# EAGLE board tmp (EAGLE 6.1), part 1 of 2
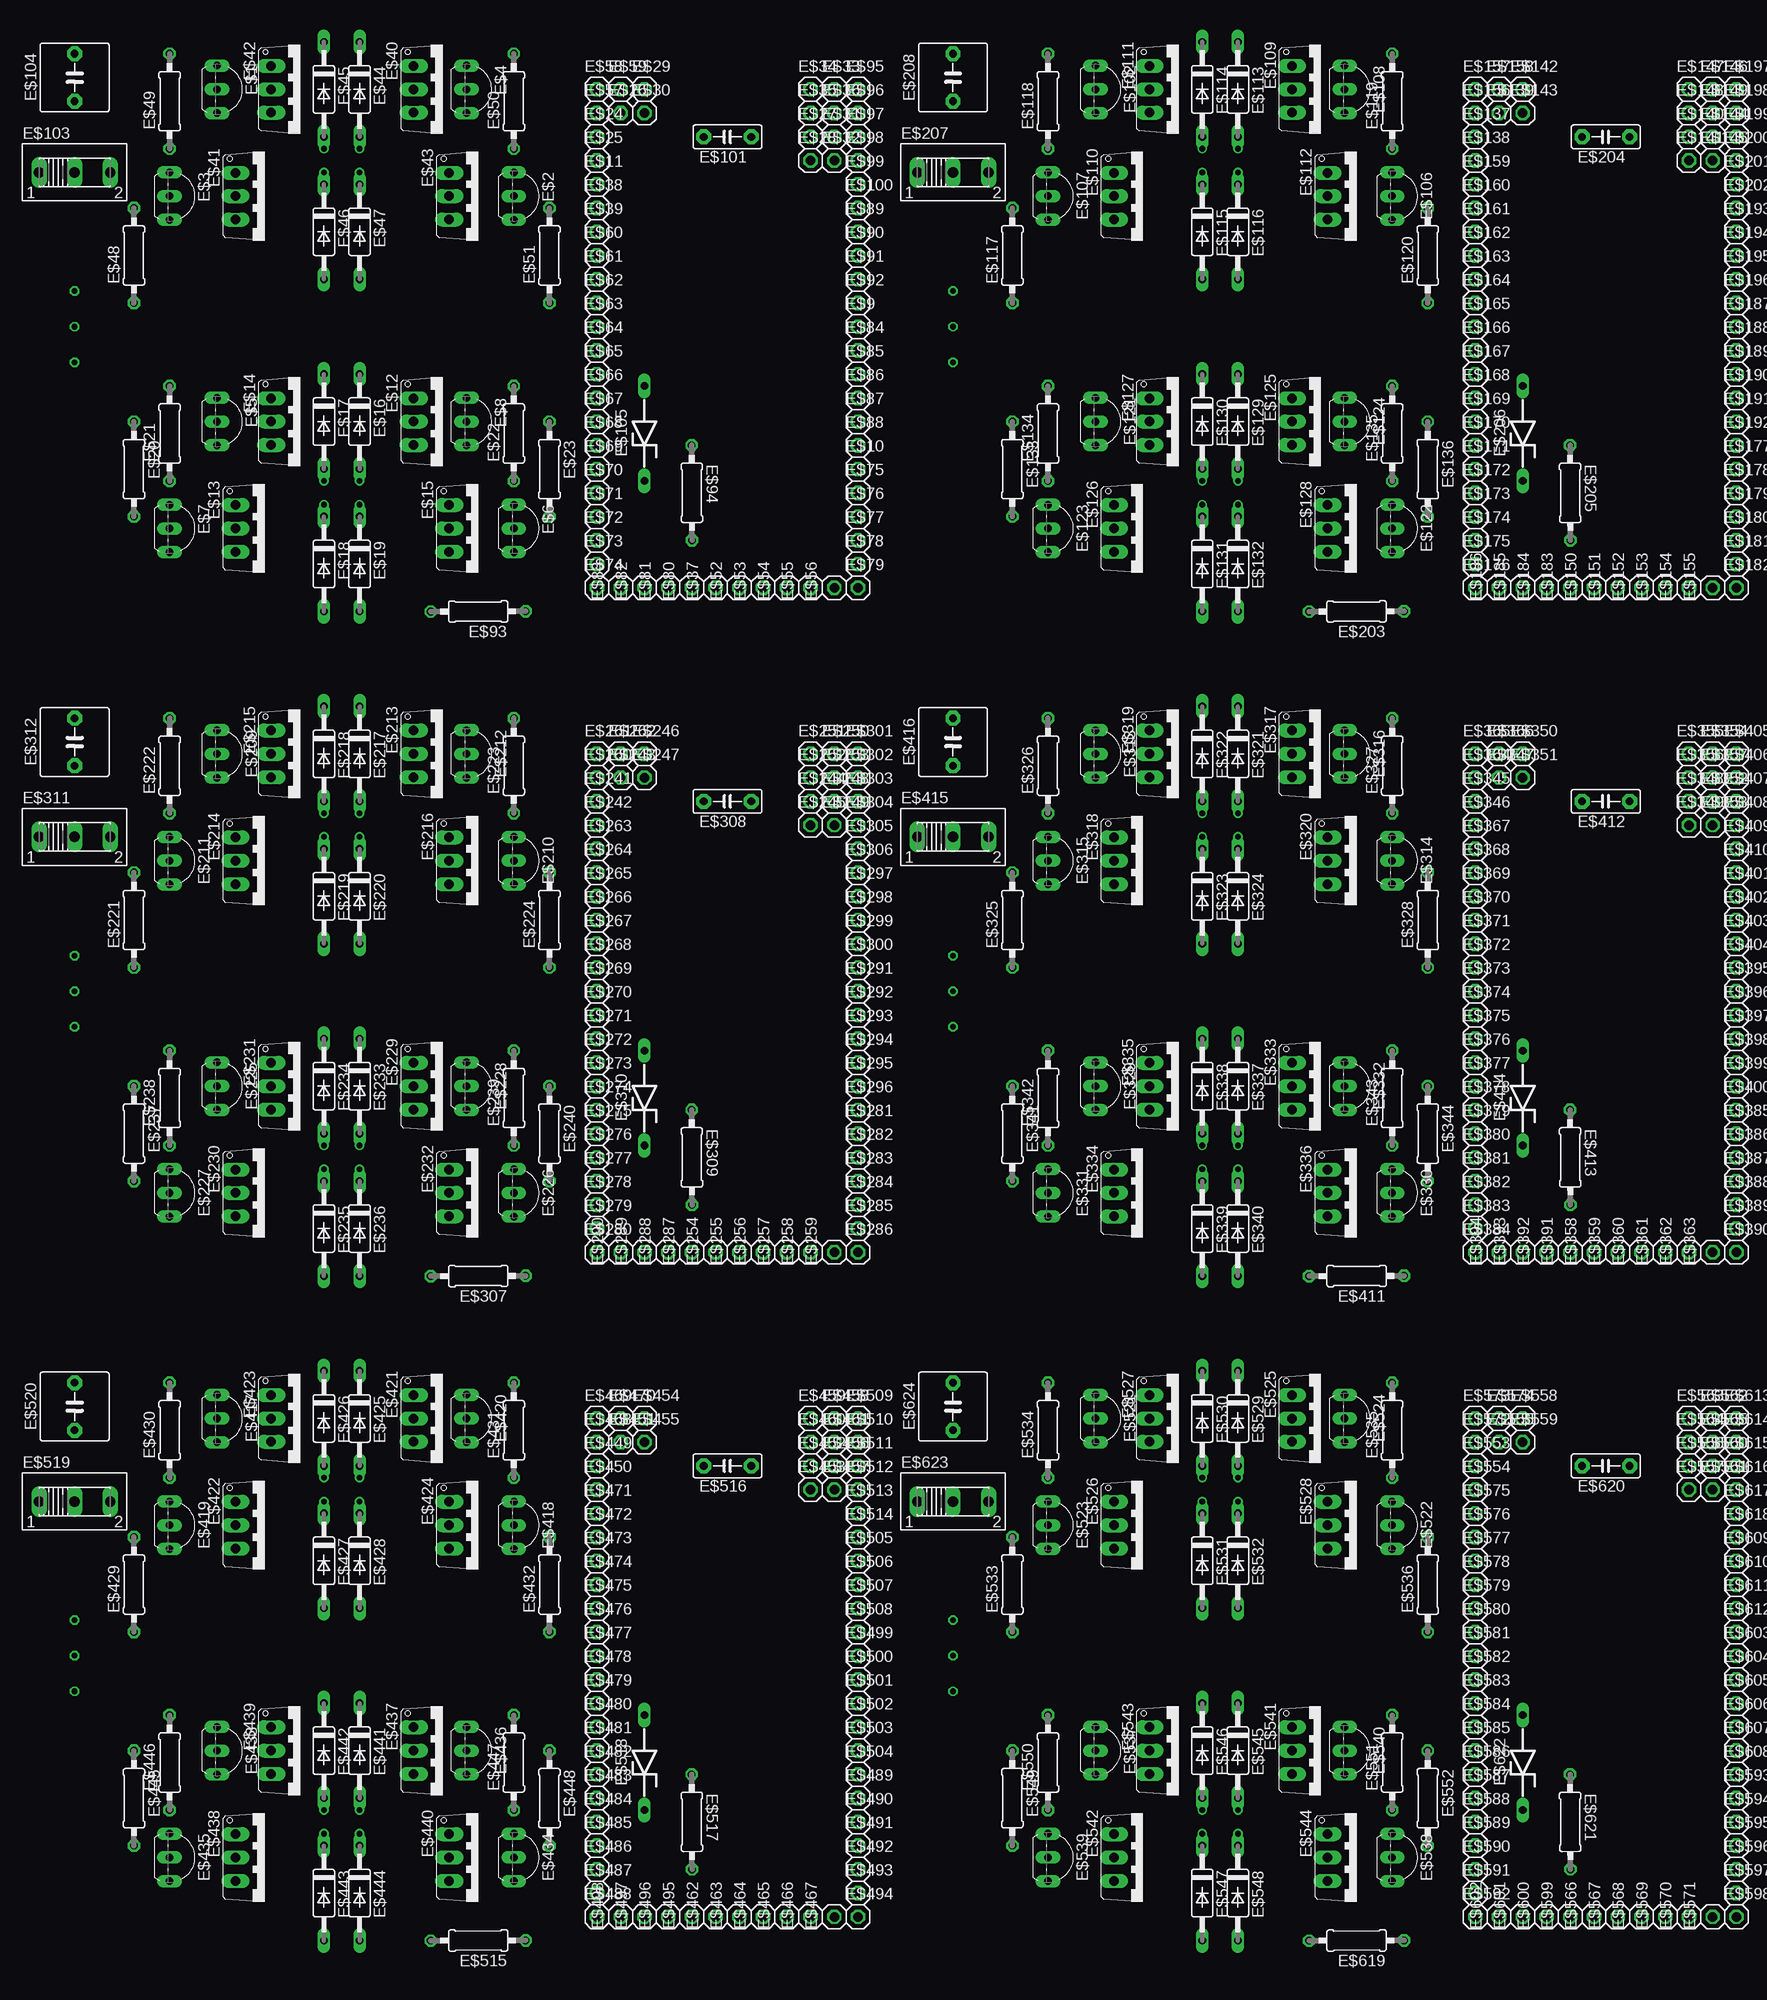
[diagram p0: board, top side]
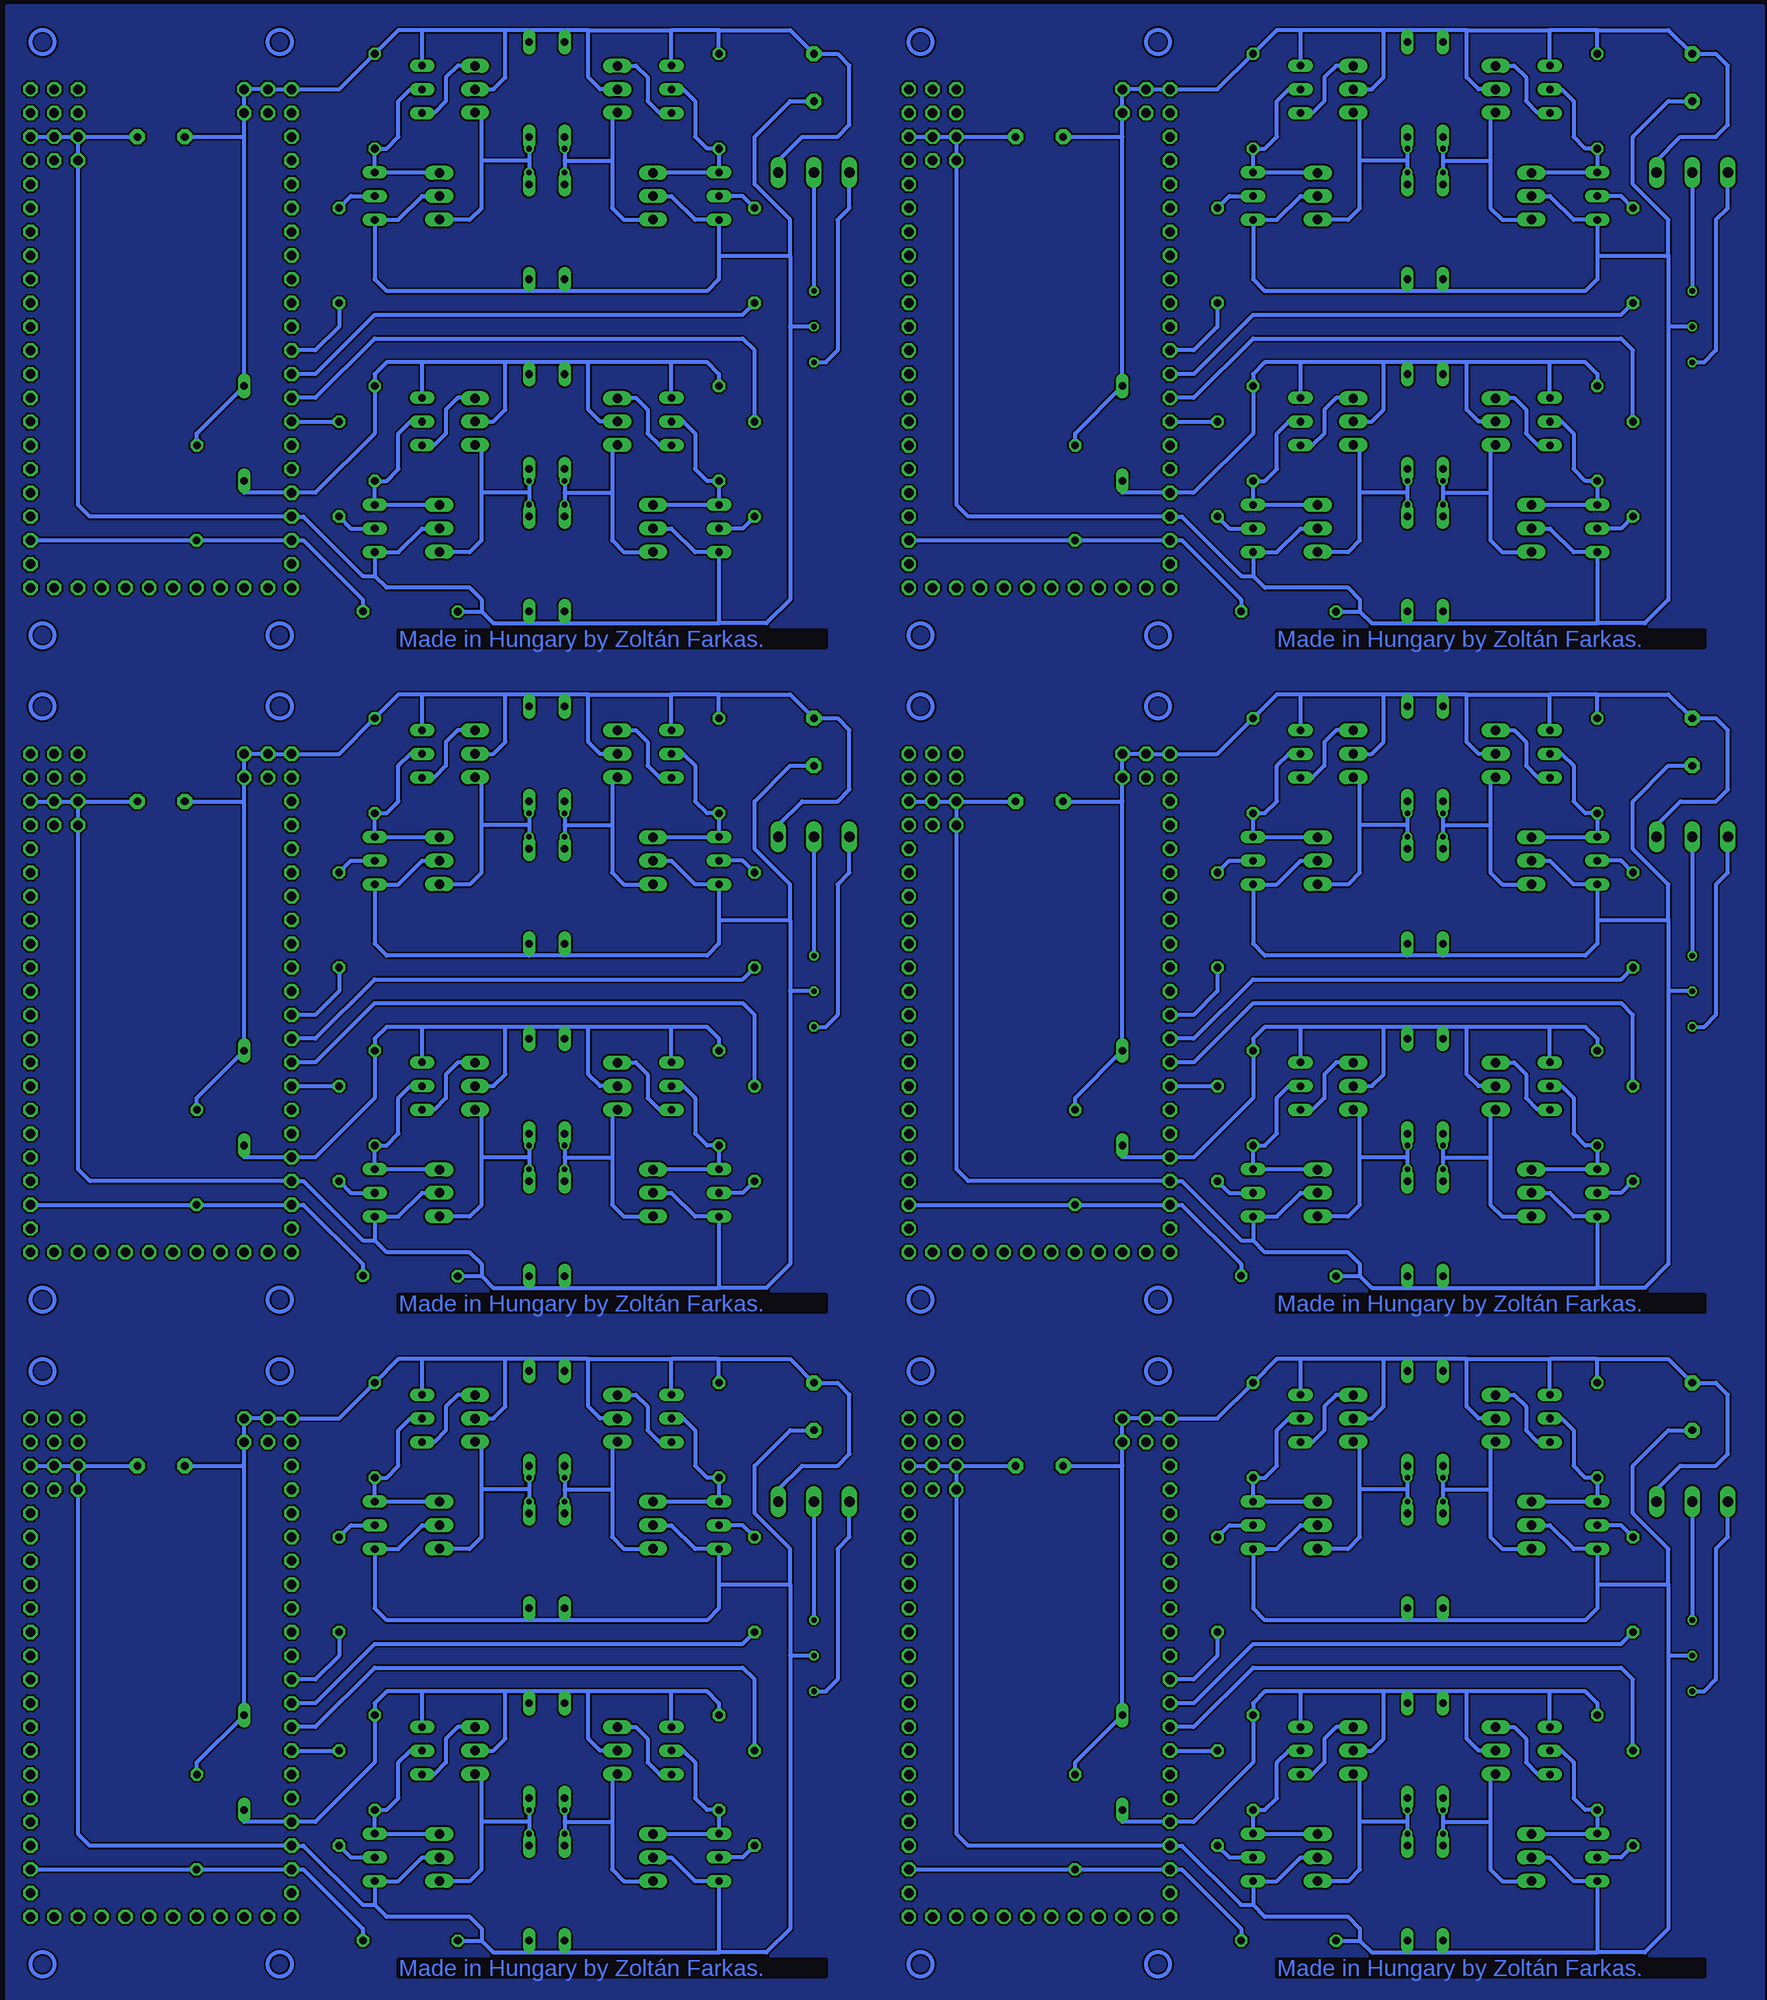
[diagram p1: board, bottom side, seen from below]

No outline drawn. Coordinates in mm, seen from the top.
Copper layers (1*16): Top 0.035mm / dielectric 1.5mm / Bottom 0.035mm
Design rules: minimum track width 10mil, minimum drill 24mil, track to track 8mil, track to pad 8mil, pad to pad 8mil, via to via 8mil, smd to smd 8mil, copper to edge 40mil, drill to drill 8mil, minimum pad ring 10mil, minimum via ring 8mil, stop-mask expansion 4mil, vias tented up to drill 0mil, thermal gap 10mil

## Footprints (pad centres in the part's own frame; a part is rotated, then mirrored left to right if it is on the bottom)
TO92-CBE = drill 0.813 long: B 0,0; C -2.54,0; E 2.54,0
1X01 = drill 1.016 octagon: 1 0,0
T-30_V = drill 1.016 long: 1 -2.5,-3.1; 2 0,-3.1; 3 2.5,-3.1
C2992 = drill 0.813 long: A 5.08,0; C -5.08,0
0207/10 = drill 0.813 octagon: 1 -5.08,0; 2 5.08,0
C5B2.5 = drill 0.813 pad 1.6 octagon: 1 -2.54,0; 2 2.54,0
255SB = drill 1.118 long: 1 -3.81,0; 2 0,0; 3 3.81,0
C5B7.2 = drill 0.813 pad 1.6 octagon: 1 -2.54,0; 2 2.54,0
ZDIO-10 = drill 0.813 long: A 5.08,0; C -5.08,0

## Placement (x,y rotation side)
E$1  [TO92-CBE]  43.18,92.71 270 top
E$2  [TO92-CBE]  74.93,81.28 270 top
E$3  [TO92-CBE]  38.1,81.28 270 top
E$4  [TO92-CBE]  69.85,92.71 270 top
E$5  [TO92-CBE]  43.18,57.15 270 top
E$6  [TO92-CBE]  74.93,45.72 270 top
E$7  [TO92-CBE]  38.1,45.72 270 top
E$8  [TO92-CBE]  69.85,57.15 270 top
E$9  [1X01]  111.76,67.31 0 top
E$10  [1X01]  111.76,52.07 0 top
E$11  [1X01]  83.82,82.55 0 top
E$12  [T-30_V]  67.31,57.15 270 top
E$13  [T-30_V]  48.26,45.72 270 top
E$14  [T-30_V]  52.07,57.15 270 top
E$15  [T-30_V]  71.12,45.72 270 top
E$16  [C2992]  58.42,57.15 270 top
E$17  [C2992]  54.61,57.15 270 top
E$18  [C2992]  54.61,41.91 270 top
E$19  [C2992]  58.42,41.91 270 top
E$20  [0207/10]  34.29,52.07 270 top
E$21  [0207/10]  38.1,55.88 90 top
E$22  [0207/10]  74.93,55.88 90 top
E$23  [0207/10]  78.74,52.07 270 top
E$24  [1X01]  83.82,87.63 0 top
E$25  [1X01]  83.82,85.09 0 top
E$26  [1X01]  86.36,90.17 0 top
E$27  [1X01]  106.68,87.63 0 top
E$28  [1X01]  106.68,85.09 0 top
E$29  [1X01]  88.9,92.71 0 top
E$30  [1X01]  88.9,90.17 0 top
E$31  [1X01]  109.22,87.63 0 top
E$32  [1X01]  109.22,85.09 0 top
E$33  [1X01]  109.22,92.71 0 top
E$34  [1X01]  106.68,92.71 0 top
E$35  [1X01]  106.68,90.17 0 top
E$36  [1X01]  109.22,90.17 0 top
E$37  [1X01]  96.52,39.37 90 top
E$38  [1X01]  83.82,80.01 0 top
E$39  [1X01]  83.82,77.47 0 top
E$40  [T-30_V]  67.31,92.71 270 top
E$41  [T-30_V]  48.26,81.28 270 top
E$42  [T-30_V]  52.07,92.71 270 top
E$43  [T-30_V]  71.12,81.28 270 top
E$44  [C2992]  58.42,92.71 270 top
E$45  [C2992]  54.61,92.71 270 top
E$46  [C2992]  54.61,77.47 270 top
E$47  [C2992]  58.42,77.47 270 top
E$48  [0207/10]  34.29,74.93 90 top
E$49  [0207/10]  38.1,91.44 90 top
E$50  [0207/10]  74.93,91.44 90 top
E$51  [0207/10]  78.74,74.93 90 top
E$52  [1X01]  99.06,39.37 90 top
E$53  [1X01]  101.6,39.37 90 top
E$54  [1X01]  104.14,39.37 90 top
E$55  [1X01]  106.68,39.37 90 top
E$56  [1X01]  109.22,39.37 90 top
E$57  [1X01]  83.82,90.17 0 top
E$58  [1X01]  83.82,92.71 0 top
E$59  [1X01]  86.36,92.71 0 top
E$60  [1X01]  83.82,74.93 0 top
E$61  [1X01]  83.82,72.39 0 top
E$62  [1X01]  83.82,69.85 0 top
E$63  [1X01]  83.82,67.31 0 top
E$64  [1X01]  83.82,64.77 0 top
E$65  [1X01]  83.82,62.23 0 top
E$66  [1X01]  83.82,59.69 0 top
E$67  [1X01]  83.82,57.15 0 top
E$68  [1X01]  83.82,54.61 0 top
E$69  [1X01]  83.82,52.07 0 top
E$70  [1X01]  83.82,49.53 0 top
E$71  [1X01]  83.82,46.99 0 top
E$72  [1X01]  83.82,44.45 0 top
E$73  [1X01]  83.82,41.91 0 top
E$74  [1X01]  83.82,39.37 0 top
E$75  [1X01]  111.76,49.53 0 top
E$76  [1X01]  111.76,46.99 0 top
E$77  [1X01]  111.76,44.45 0 top
E$78  [1X01]  111.76,41.91 0 top
E$79  [1X01]  111.76,39.37 0 top
E$80  [1X01]  93.98,39.37 90 top
E$81  [1X01]  91.44,39.37 90 top
E$82  [1X01]  88.9,39.37 90 top
E$83  [1X01]  86.36,39.37 90 top
E$84  [1X01]  111.76,64.77 0 top
E$85  [1X01]  111.76,62.23 0 top
E$86  [1X01]  111.76,59.69 0 top
E$87  [1X01]  111.76,57.15 0 top
E$88  [1X01]  111.76,54.61 0 top
E$89  [1X01]  111.76,77.47 0 top
E$90  [1X01]  111.76,74.93 0 top
E$91  [1X01]  111.76,72.39 0 top
E$92  [1X01]  111.76,69.85 0 top
E$93  [0207/10]  71.12,36.83 180.2 top
E$94  [0207/10]  93.98,49.53 270.2 top
E$95  [1X01]  111.76,92.71 0 top
E$96  [1X01]  111.76,90.17 0 top
E$97  [1X01]  111.76,87.63 0 top
E$98  [1X01]  111.76,85.09 0 top
E$99  [1X01]  111.76,82.55 0 top
E$100  [1X01]  111.76,80.01 0 top
E$101  [C5B2.5]  97.79,87.63 180 top
E$102  [TO92-CBE]  137.16,92.71 270 top
E$103  [255SB]  27.94,83.82 0 top
E$104  [C5B7.2]  27.94,93.98 90 top
E$105  [ZDIO-10]  88.9,55.88 90 top
E$106  [TO92-CBE]  168.91,81.28 270 top
E$107  [TO92-CBE]  132.08,81.28 270 top
E$108  [TO92-CBE]  163.83,92.71 270 top
E$109  [T-30_V]  161.29,92.71 270 top
E$110  [T-30_V]  142.24,81.28 270 top
E$111  [T-30_V]  146.05,92.71 270 top
E$112  [T-30_V]  165.1,81.28 270 top
E$113  [C2992]  152.4,92.71 270 top
E$114  [C2992]  148.59,92.71 270 top
E$115  [C2992]  148.59,77.47 270 top
E$116  [C2992]  152.4,77.47 270 top
E$117  [0207/10]  128.27,74.93 90 top
E$118  [0207/10]  132.08,91.44 90 top
E$119  [0207/10]  168.91,91.44 90 top
E$120  [0207/10]  172.72,74.93 90 top
E$121  [TO92-CBE]  137.16,57.15 270 top
E$122  [TO92-CBE]  168.91,45.72 270 top
E$123  [TO92-CBE]  132.08,45.72 270 top
E$124  [TO92-CBE]  163.83,57.15 270 top
E$125  [T-30_V]  161.29,57.15 270 top
E$126  [T-30_V]  142.24,45.72 270 top
E$127  [T-30_V]  146.05,57.15 270 top
E$128  [T-30_V]  165.1,45.72 270 top
E$129  [C2992]  152.4,57.15 270 top
E$130  [C2992]  148.59,57.15 270 top
E$131  [C2992]  148.59,41.91 270 top
E$132  [C2992]  152.4,41.91 270 top
E$133  [0207/10]  128.27,52.07 270 top
E$134  [0207/10]  132.08,55.88 90 top
E$135  [0207/10]  168.91,55.88 90 top
E$136  [0207/10]  172.72,52.07 270 top
E$137  [1X01]  177.8,87.63 0 top
E$138  [1X01]  177.8,85.09 0 top
E$139  [1X01]  180.34,90.17 0 top
E$140  [1X01]  200.66,87.63 0 top
E$141  [1X01]  200.66,85.09 0 top
E$142  [1X01]  182.88,92.71 0 top
E$143  [1X01]  182.88,90.17 0 top
E$144  [1X01]  203.2,87.63 0 top
E$145  [1X01]  203.2,85.09 0 top
E$146  [1X01]  203.2,92.71 0 top
E$147  [1X01]  200.66,92.71 0 top
E$148  [1X01]  200.66,90.17 0 top
E$149  [1X01]  203.2,90.17 0 top
E$150  [1X01]  190.5,39.37 90 top
E$151  [1X01]  193.04,39.37 90 top
E$152  [1X01]  195.58,39.37 90 top
E$153  [1X01]  198.12,39.37 90 top
E$154  [1X01]  200.66,39.37 90 top
E$155  [1X01]  203.2,39.37 90 top
E$156  [1X01]  177.8,90.17 0 top
E$157  [1X01]  177.8,92.71 0 top
E$158  [1X01]  180.34,92.71 0 top
E$159  [1X01]  177.8,82.55 0 top
E$160  [1X01]  177.8,80.01 0 top
E$161  [1X01]  177.8,77.47 0 top
E$162  [1X01]  177.8,74.93 0 top
E$163  [1X01]  177.8,72.39 0 top
E$164  [1X01]  177.8,69.85 0 top
E$165  [1X01]  177.8,67.31 0 top
E$166  [1X01]  177.8,64.77 0 top
E$167  [1X01]  177.8,62.23 0 top
E$168  [1X01]  177.8,59.69 0 top
E$169  [1X01]  177.8,57.15 0 top
E$170  [1X01]  177.8,54.61 0 top
E$171  [1X01]  177.8,52.07 0 top
E$172  [1X01]  177.8,49.53 0 top
E$173  [1X01]  177.8,46.99 0 top
E$174  [1X01]  177.8,44.45 0 top
E$175  [1X01]  177.8,41.91 0 top
E$176  [1X01]  177.8,39.37 0 top
E$177  [1X01]  205.74,52.07 0 top
E$178  [1X01]  205.74,49.53 0 top
E$179  [1X01]  205.74,46.99 0 top
E$180  [1X01]  205.74,44.45 0 top
E$181  [1X01]  205.74,41.91 0 top
E$182  [1X01]  205.74,39.37 0 top
E$183  [1X01]  187.96,39.37 90 top
E$184  [1X01]  185.42,39.37 90 top
E$185  [1X01]  182.88,39.37 90 top
E$186  [1X01]  180.34,39.37 90 top
E$187  [1X01]  205.74,67.31 0 top
E$188  [1X01]  205.74,64.77 0 top
E$189  [1X01]  205.74,62.23 0 top
E$190  [1X01]  205.74,59.69 0 top
E$191  [1X01]  205.74,57.15 0 top
E$192  [1X01]  205.74,54.61 0 top
E$193  [1X01]  205.74,77.47 0 top
E$194  [1X01]  205.74,74.93 0 top
E$195  [1X01]  205.74,72.39 0 top
E$196  [1X01]  205.74,69.85 0 top
E$197  [1X01]  205.74,92.71 0 top
E$198  [1X01]  205.74,90.17 0 top
E$199  [1X01]  205.74,87.63 0 top
E$200  [1X01]  205.74,85.09 0 top
E$201  [1X01]  205.74,82.55 0 top
E$202  [1X01]  205.74,80.01 0 top
E$203  [0207/10]  165.1,36.83 180.2 top
E$204  [C5B2.5]  191.77,87.63 180 top
E$205  [0207/10]  187.96,49.53 270.2 top
E$206  [ZDIO-10]  182.88,55.88 90 top
E$207  [255SB]  121.92,83.82 0 top
E$208  [C5B7.2]  121.92,93.98 90 top
E$209  [TO92-CBE]  43.18,21.59 270 top
E$210  [TO92-CBE]  74.93,10.16 270 top
E$211  [TO92-CBE]  38.1,10.16 270 top
E$212  [TO92-CBE]  69.85,21.59 270 top
E$213  [T-30_V]  67.31,21.59 270 top
E$214  [T-30_V]  48.26,10.16 270 top
E$215  [T-30_V]  52.07,21.59 270 top
E$216  [T-30_V]  71.12,10.16 270 top
E$217  [C2992]  58.42,21.59 270 top
E$218  [C2992]  54.61,21.59 270 top
E$219  [C2992]  54.61,6.35 270 top
E$220  [C2992]  58.42,6.35 270 top
E$221  [0207/10]  34.29,3.81 90 top
E$222  [0207/10]  38.1,20.32 90 top
E$223  [0207/10]  74.93,20.32 90 top
E$224  [0207/10]  78.74,3.81 90 top
E$225  [TO92-CBE]  43.18,-13.97 270 top
E$226  [TO92-CBE]  74.93,-25.4 270 top
E$227  [TO92-CBE]  38.1,-25.4 270 top
E$228  [TO92-CBE]  69.85,-13.97 270 top
E$229  [T-30_V]  67.31,-13.97 270 top
E$230  [T-30_V]  48.26,-25.4 270 top
E$231  [T-30_V]  52.07,-13.97 270 top
E$232  [T-30_V]  71.12,-25.4 270 top
E$233  [C2992]  58.42,-13.97 270 top
E$234  [C2992]  54.61,-13.97 270 top
E$235  [C2992]  54.61,-29.21 270 top
E$236  [C2992]  58.42,-29.21 270 top
E$237  [0207/10]  34.29,-19.05 270 top
E$238  [0207/10]  38.1,-15.24 90 top
E$239  [0207/10]  74.93,-15.24 90 top
E$240  [0207/10]  78.74,-19.05 270 top
E$241  [1X01]  83.82,16.51 0 top
E$242  [1X01]  83.82,13.97 0 top
E$243  [1X01]  86.36,19.05 0 top
E$244  [1X01]  106.68,16.51 0 top
E$245  [1X01]  106.68,13.97 0 top
E$246  [1X01]  88.9,21.59 0 top
E$247  [1X01]  88.9,19.05 0 top
E$248  [1X01]  109.22,16.51 0 top
E$249  [1X01]  109.22,13.97 0 top
E$250  [1X01]  109.22,21.59 0 top
E$251  [1X01]  106.68,21.59 0 top
E$252  [1X01]  106.68,19.05 0 top
E$253  [1X01]  109.22,19.05 0 top
E$254  [1X01]  96.52,-31.75 90 top
E$255  [1X01]  99.06,-31.75 90 top
E$256  [1X01]  101.6,-31.75 90 top
E$257  [1X01]  104.14,-31.75 90 top
E$258  [1X01]  106.68,-31.75 90 top
E$259  [1X01]  109.22,-31.75 90 top
E$260  [1X01]  83.82,19.05 0 top
E$261  [1X01]  83.82,21.59 0 top
E$262  [1X01]  86.36,21.59 0 top
E$263  [1X01]  83.82,11.43 0 top
E$264  [1X01]  83.82,8.89 0 top
E$265  [1X01]  83.82,6.35 0 top
E$266  [1X01]  83.82,3.81 0 top
E$267  [1X01]  83.82,1.27 0 top
E$268  [1X01]  83.82,-1.27 0 top
E$269  [1X01]  83.82,-3.81 0 top
E$270  [1X01]  83.82,-6.35 0 top
E$271  [1X01]  83.82,-8.89 0 top
E$272  [1X01]  83.82,-11.43 0 top
E$273  [1X01]  83.82,-13.97 0 top
E$274  [1X01]  83.82,-16.51 0 top
E$275  [1X01]  83.82,-19.05 0 top
E$276  [1X01]  83.82,-21.59 0 top
E$277  [1X01]  83.82,-24.13 0 top
E$278  [1X01]  83.82,-26.67 0 top
E$279  [1X01]  83.82,-29.21 0 top
E$280  [1X01]  83.82,-31.75 0 top
E$281  [1X01]  111.76,-19.05 0 top
E$282  [1X01]  111.76,-21.59 0 top
E$283  [1X01]  111.76,-24.13 0 top
E$284  [1X01]  111.76,-26.67 0 top
E$285  [1X01]  111.76,-29.21 0 top
E$286  [1X01]  111.76,-31.75 0 top
E$287  [1X01]  93.98,-31.75 90 top
E$288  [1X01]  91.44,-31.75 90 top
E$289  [1X01]  88.9,-31.75 90 top
E$290  [1X01]  86.36,-31.75 90 top
E$291  [1X01]  111.76,-3.81 0 top
E$292  [1X01]  111.76,-6.35 0 top
E$293  [1X01]  111.76,-8.89 0 top
E$294  [1X01]  111.76,-11.43 0 top
E$295  [1X01]  111.76,-13.97 0 top
E$296  [1X01]  111.76,-16.51 0 top
E$297  [1X01]  111.76,6.35 0 top
E$298  [1X01]  111.76,3.81 0 top
E$299  [1X01]  111.76,1.27 0 top
E$300  [1X01]  111.76,-1.27 0 top
E$301  [1X01]  111.76,21.59 0 top
E$302  [1X01]  111.76,19.05 0 top
E$303  [1X01]  111.76,16.51 0 top
E$304  [1X01]  111.76,13.97 0 top
E$305  [1X01]  111.76,11.43 0 top
E$306  [1X01]  111.76,8.89 0 top
E$307  [0207/10]  71.12,-34.29 180.2 top
E$308  [C5B2.5]  97.79,16.51 180 top
E$309  [0207/10]  93.98,-21.59 270.2 top
E$310  [ZDIO-10]  88.9,-15.24 90 top
E$311  [255SB]  27.94,12.7 0 top
E$312  [C5B7.2]  27.94,22.86 90 top
E$313  [TO92-CBE]  137.16,21.59 270 top
E$314  [TO92-CBE]  168.91,10.16 270 top
E$315  [TO92-CBE]  132.08,10.16 270 top
E$316  [TO92-CBE]  163.83,21.59 270 top
E$317  [T-30_V]  161.29,21.59 270 top
E$318  [T-30_V]  142.24,10.16 270 top
E$319  [T-30_V]  146.05,21.59 270 top
E$320  [T-30_V]  165.1,10.16 270 top
E$321  [C2992]  152.4,21.59 270 top
E$322  [C2992]  148.59,21.59 270 top
E$323  [C2992]  148.59,6.35 270 top
E$324  [C2992]  152.4,6.35 270 top
E$325  [0207/10]  128.27,3.81 90 top
E$326  [0207/10]  132.08,20.32 90 top
E$327  [0207/10]  168.91,20.32 90 top
E$328  [0207/10]  172.72,3.81 90 top
E$329  [TO92-CBE]  137.16,-13.97 270 top
E$330  [TO92-CBE]  168.91,-25.4 270 top
E$331  [TO92-CBE]  132.08,-25.4 270 top
E$332  [TO92-CBE]  163.83,-13.97 270 top
E$333  [T-30_V]  161.29,-13.97 270 top
E$334  [T-30_V]  142.24,-25.4 270 top
E$335  [T-30_V]  146.05,-13.97 270 top
E$336  [T-30_V]  165.1,-25.4 270 top
E$337  [C2992]  152.4,-13.97 270 top
E$338  [C2992]  148.59,-13.97 270 top
E$339  [C2992]  148.59,-29.21 270 top
E$340  [C2992]  152.4,-29.21 270 top
E$341  [0207/10]  128.27,-19.05 270 top
E$342  [0207/10]  132.08,-15.24 90 top
E$343  [0207/10]  168.91,-15.24 90 top
E$344  [0207/10]  172.72,-19.05 270 top
E$345  [1X01]  177.8,16.51 0 top
E$346  [1X01]  177.8,13.97 0 top
E$347  [1X01]  180.34,19.05 0 top
E$348  [1X01]  200.66,16.51 0 top
E$349  [1X01]  200.66,13.97 0 top
E$350  [1X01]  182.88,21.59 0 top
E$351  [1X01]  182.88,19.05 0 top
E$352  [1X01]  203.2,16.51 0 top
E$353  [1X01]  203.2,13.97 0 top
E$354  [1X01]  203.2,21.59 0 top
E$355  [1X01]  200.66,21.59 0 top
E$356  [1X01]  200.66,19.05 0 top
E$357  [1X01]  203.2,19.05 0 top
E$358  [1X01]  190.5,-31.75 90 top
E$359  [1X01]  193.04,-31.75 90 top
E$360  [1X01]  195.58,-31.75 90 top
E$361  [1X01]  198.12,-31.75 90 top
E$362  [1X01]  200.66,-31.75 90 top
E$363  [1X01]  203.2,-31.75 90 top
E$364  [1X01]  177.8,19.05 0 top
E$365  [1X01]  177.8,21.59 0 top
E$366  [1X01]  180.34,21.59 0 top
E$367  [1X01]  177.8,11.43 0 top
E$368  [1X01]  177.8,8.89 0 top
E$369  [1X01]  177.8,6.35 0 top
E$370  [1X01]  177.8,3.81 0 top
E$371  [1X01]  177.8,1.27 0 top
E$372  [1X01]  177.8,-1.27 0 top
E$373  [1X01]  177.8,-3.81 0 top
E$374  [1X01]  177.8,-6.35 0 top
E$375  [1X01]  177.8,-8.89 0 top
E$376  [1X01]  177.8,-11.43 0 top
E$377  [1X01]  177.8,-13.97 0 top
E$378  [1X01]  177.8,-16.51 0 top
E$379  [1X01]  177.8,-19.05 0 top
E$380  [1X01]  177.8,-21.59 0 top
E$381  [1X01]  177.8,-24.13 0 top
E$382  [1X01]  177.8,-26.67 0 top
E$383  [1X01]  177.8,-29.21 0 top
E$384  [1X01]  177.8,-31.75 0 top
E$385  [1X01]  205.74,-19.05 0 top
E$386  [1X01]  205.74,-21.59 0 top
E$387  [1X01]  205.74,-24.13 0 top
E$388  [1X01]  205.74,-26.67 0 top
E$389  [1X01]  205.74,-29.21 0 top
E$390  [1X01]  205.74,-31.75 0 top
E$391  [1X01]  187.96,-31.75 90 top
E$392  [1X01]  185.42,-31.75 90 top
E$393  [1X01]  182.88,-31.75 90 top
E$394  [1X01]  180.34,-31.75 90 top
E$395  [1X01]  205.74,-3.81 0 top
E$396  [1X01]  205.74,-6.35 0 top
E$397  [1X01]  205.74,-8.89 0 top
E$398  [1X01]  205.74,-11.43 0 top
E$399  [1X01]  205.74,-13.97 0 top
E$400  [1X01]  205.74,-16.51 0 top
E$401  [1X01]  205.74,6.35 0 top
E$402  [1X01]  205.74,3.81 0 top
E$403  [1X01]  205.74,1.27 0 top
E$404  [1X01]  205.74,-1.27 0 top
E$405  [1X01]  205.74,21.59 0 top
E$406  [1X01]  205.74,19.05 0 top
E$407  [1X01]  205.74,16.51 0 top
E$408  [1X01]  205.74,13.97 0 top
E$409  [1X01]  205.74,11.43 0 top
E$410  [1X01]  205.74,8.89 0 top
E$411  [0207/10]  165.1,-34.29 180.2 top
E$412  [C5B2.5]  191.77,16.51 180 top
E$413  [0207/10]  187.96,-21.59 270.2 top
E$414  [ZDIO-10]  182.88,-15.24 90 top
E$415  [255SB]  121.92,12.7 0 top
E$416  [C5B7.2]  121.92,22.86 90 top
E$417  [TO92-CBE]  43.18,-49.53 270 top
E$418  [TO92-CBE]  74.93,-60.96 270 top
E$419  [TO92-CBE]  38.1,-60.96 270 top
E$420  [TO92-CBE]  69.85,-49.53 270 top
E$421  [T-30_V]  67.31,-49.53 270 top
E$422  [T-30_V]  48.26,-60.96 270 top
E$423  [T-30_V]  52.07,-49.53 270 top
E$424  [T-30_V]  71.12,-60.96 270 top
E$425  [C2992]  58.42,-49.53 270 top
E$426  [C2992]  54.61,-49.53 270 top
E$427  [C2992]  54.61,-64.77 270 top
E$428  [C2992]  58.42,-64.77 270 top
E$429  [0207/10]  34.29,-67.31 90 top
E$430  [0207/10]  38.1,-50.8 90 top
E$431  [0207/10]  74.93,-50.8 90 top
E$432  [0207/10]  78.74,-67.31 90 top
E$433  [TO92-CBE]  43.18,-85.09 270 top
E$434  [TO92-CBE]  74.93,-96.52 270 top
E$435  [TO92-CBE]  38.1,-96.52 270 top
E$436  [TO92-CBE]  69.85,-85.09 270 top
E$437  [T-30_V]  67.31,-85.09 270 top
E$438  [T-30_V]  48.26,-96.52 270 top
E$439  [T-30_V]  52.07,-85.09 270 top
E$440  [T-30_V]  71.12,-96.52 270 top
E$441  [C2992]  58.42,-85.09 270 top
E$442  [C2992]  54.61,-85.09 270 top
E$443  [C2992]  54.61,-100.33 270 top
E$444  [C2992]  58.42,-100.33 270 top
E$445  [0207/10]  34.29,-90.17 270 top
E$446  [0207/10]  38.1,-86.36 90 top
E$447  [0207/10]  74.93,-86.36 90 top
E$448  [0207/10]  78.74,-90.17 270 top
E$449  [1X01]  83.82,-54.61 0 top
E$450  [1X01]  83.82,-57.15 0 top
E$451  [1X01]  86.36,-52.07 0 top
E$452  [1X01]  106.68,-54.61 0 top
E$453  [1X01]  106.68,-57.15 0 top
E$454  [1X01]  88.9,-49.53 0 top
E$455  [1X01]  88.9,-52.07 0 top
E$456  [1X01]  109.22,-54.61 0 top
E$457  [1X01]  109.22,-57.15 0 top
E$458  [1X01]  109.22,-49.53 0 top
E$459  [1X01]  106.68,-49.53 0 top
E$460  [1X01]  106.68,-52.07 0 top
E$461  [1X01]  109.22,-52.07 0 top
E$462  [1X01]  96.52,-102.87 90 top
E$463  [1X01]  99.06,-102.87 90 top
E$464  [1X01]  101.6,-102.87 90 top
E$465  [1X01]  104.14,-102.87 90 top
E$466  [1X01]  106.68,-102.87 90 top
E$467  [1X01]  109.22,-102.87 90 top
E$468  [1X01]  83.82,-52.07 0 top
E$469  [1X01]  83.82,-49.53 0 top
E$470  [1X01]  86.36,-49.53 0 top
E$471  [1X01]  83.82,-59.69 0 top
E$472  [1X01]  83.82,-62.23 0 top
E$473  [1X01]  83.82,-64.77 0 top
E$474  [1X01]  83.82,-67.31 0 top
E$475  [1X01]  83.82,-69.85 0 top
E$476  [1X01]  83.82,-72.39 0 top
E$477  [1X01]  83.82,-74.93 0 top
E$478  [1X01]  83.82,-77.47 0 top
E$479  [1X01]  83.82,-80.01 0 top
E$480  [1X01]  83.82,-82.55 0 top
E$481  [1X01]  83.82,-85.09 0 top
E$482  [1X01]  83.82,-87.63 0 top
E$483  [1X01]  83.82,-90.17 0 top
E$484  [1X01]  83.82,-92.71 0 top
E$485  [1X01]  83.82,-95.25 0 top
E$486  [1X01]  83.82,-97.79 0 top
E$487  [1X01]  83.82,-100.33 0 top
E$488  [1X01]  83.82,-102.87 0 top
E$489  [1X01]  111.76,-90.17 0 top
E$490  [1X01]  111.76,-92.71 0 top
E$491  [1X01]  111.76,-95.25 0 top
E$492  [1X01]  111.76,-97.79 0 top
E$493  [1X01]  111.76,-100.33 0 top
E$494  [1X01]  111.76,-102.87 0 top
E$495  [1X01]  93.98,-102.87 90 top
E$496  [1X01]  91.44,-102.87 90 top
E$497  [1X01]  88.9,-102.87 90 top
E$498  [1X01]  86.36,-102.87 90 top
E$499  [1X01]  111.76,-74.93 0 top
E$500  [1X01]  111.76,-77.47 0 top
E$501  [1X01]  111.76,-80.01 0 top
E$502  [1X01]  111.76,-82.55 0 top
E$503  [1X01]  111.76,-85.09 0 top
E$504  [1X01]  111.76,-87.63 0 top
E$505  [1X01]  111.76,-64.77 0 top
E$506  [1X01]  111.76,-67.31 0 top
E$507  [1X01]  111.76,-69.85 0 top
E$508  [1X01]  111.76,-72.39 0 top
E$509  [1X01]  111.76,-49.53 0 top
E$510  [1X01]  111.76,-52.07 0 top
E$511  [1X01]  111.76,-54.61 0 top
E$512  [1X01]  111.76,-57.15 0 top
E$513  [1X01]  111.76,-59.69 0 top
E$514  [1X01]  111.76,-62.23 0 top
E$515  [0207/10]  71.12,-105.41 180.2 top
E$516  [C5B2.5]  97.79,-54.61 180 top
E$517  [0207/10]  93.98,-92.71 270.2 top
E$518  [ZDIO-10]  88.9,-86.36 90 top
E$519  [255SB]  27.94,-58.42 0 top
E$520  [C5B7.2]  27.94,-48.26 90 top
E$521  [TO92-CBE]  137.16,-49.53 270 top
E$522  [TO92-CBE]  168.91,-60.96 270 top
E$523  [TO92-CBE]  132.08,-60.96 270 top
E$524  [TO92-CBE]  163.83,-49.53 270 top
E$525  [T-30_V]  161.29,-49.53 270 top
E$526  [T-30_V]  142.24,-60.96 270 top
E$527  [T-30_V]  146.05,-49.53 270 top
E$528  [T-30_V]  165.1,-60.96 270 top
E$529  [C2992]  152.4,-49.53 270 top
E$530  [C2992]  148.59,-49.53 270 top
E$531  [C2992]  148.59,-64.77 270 top
E$532  [C2992]  152.4,-64.77 270 top
E$533  [0207/10]  128.27,-67.31 90 top
E$534  [0207/10]  132.08,-50.8 90 top
E$535  [0207/10]  168.91,-50.8 90 top
E$536  [0207/10]  172.72,-67.31 90 top
E$537  [TO92-CBE]  137.16,-85.09 270 top
E$538  [TO92-CBE]  168.91,-96.52 270 top
E$539  [TO92-CBE]  132.08,-96.52 270 top
E$540  [TO92-CBE]  163.83,-85.09 270 top
E$541  [T-30_V]  161.29,-85.09 270 top
E$542  [T-30_V]  142.24,-96.52 270 top
E$543  [T-30_V]  146.05,-85.09 270 top
E$544  [T-30_V]  165.1,-96.52 270 top
E$545  [C2992]  152.4,-85.09 270 top
E$546  [C2992]  148.59,-85.09 270 top
E$547  [C2992]  148.59,-100.33 270 top
E$548  [C2992]  152.4,-100.33 270 top
E$549  [0207/10]  128.27,-90.17 270 top
E$550  [0207/10]  132.08,-86.36 90 top
E$551  [0207/10]  168.91,-86.36 90 top
E$552  [0207/10]  172.72,-90.17 270 top
E$553  [1X01]  177.8,-54.61 0 top
E$554  [1X01]  177.8,-57.15 0 top
E$555  [1X01]  180.34,-52.07 0 top
E$556  [1X01]  200.66,-54.61 0 top
E$557  [1X01]  200.66,-57.15 0 top
E$558  [1X01]  182.88,-49.53 0 top
E$559  [1X01]  182.88,-52.07 0 top
E$560  [1X01]  203.2,-54.61 0 top
E$561  [1X01]  203.2,-57.15 0 top
E$562  [1X01]  203.2,-49.53 0 top
E$563  [1X01]  200.66,-49.53 0 top
E$564  [1X01]  200.66,-52.07 0 top
E$565  [1X01]  203.2,-52.07 0 top
E$566  [1X01]  190.5,-102.87 90 top
E$567  [1X01]  193.04,-102.87 90 top
E$568  [1X01]  195.58,-102.87 90 top
E$569  [1X01]  198.12,-102.87 90 top
E$570  [1X01]  200.66,-102.87 90 top
E$571  [1X01]  203.2,-102.87 90 top
E$572  [1X01]  177.8,-52.07 0 top
E$573  [1X01]  177.8,-49.53 0 top
E$574  [1X01]  180.34,-49.53 0 top
E$575  [1X01]  177.8,-59.69 0 top
E$576  [1X01]  177.8,-62.23 0 top
E$577  [1X01]  177.8,-64.77 0 top
E$578  [1X01]  177.8,-67.31 0 top
E$579  [1X01]  177.8,-69.85 0 top
E$580  [1X01]  177.8,-72.39 0 top
E$581  [1X01]  177.8,-74.93 0 top
E$582  [1X01]  177.8,-77.47 0 top
E$583  [1X01]  177.8,-80.01 0 top
E$584  [1X01]  177.8,-82.55 0 top
E$585  [1X01]  177.8,-85.09 0 top
E$586  [1X01]  177.8,-87.63 0 top
E$587  [1X01]  177.8,-90.17 0 top
E$588  [1X01]  177.8,-92.71 0 top
E$589  [1X01]  177.8,-95.25 0 top
E$590  [1X01]  177.8,-97.79 0 top
E$591  [1X01]  177.8,-100.33 0 top
E$592  [1X01]  177.8,-102.87 0 top
E$593  [1X01]  205.74,-90.17 0 top
E$594  [1X01]  205.74,-92.71 0 top
E$595  [1X01]  205.74,-95.25 0 top
E$596  [1X01]  205.74,-97.79 0 top
E$597  [1X01]  205.74,-100.33 0 top
E$598  [1X01]  205.74,-102.87 0 top
E$599  [1X01]  187.96,-102.87 90 top
E$600  [1X01]  185.42,-102.87 90 top
E$601  [1X01]  182.88,-102.87 90 top
E$602  [1X01]  180.34,-102.87 90 top
E$603  [1X01]  205.74,-74.93 0 top
E$604  [1X01]  205.74,-77.47 0 top
E$605  [1X01]  205.74,-80.01 0 top
E$606  [1X01]  205.74,-82.55 0 top
E$607  [1X01]  205.74,-85.09 0 top
E$608  [1X01]  205.74,-87.63 0 top
E$609  [1X01]  205.74,-64.77 0 top
E$610  [1X01]  205.74,-67.31 0 top
E$611  [1X01]  205.74,-69.85 0 top
E$612  [1X01]  205.74,-72.39 0 top
E$613  [1X01]  205.74,-49.53 0 top
E$614  [1X01]  205.74,-52.07 0 top
E$615  [1X01]  205.74,-54.61 0 top
E$616  [1X01]  205.74,-57.15 0 top
E$617  [1X01]  205.74,-59.69 0 top
E$618  [1X01]  205.74,-62.23 0 top
E$619  [0207/10]  165.1,-105.41 180.2 top
E$620  [C5B2.5]  191.77,-54.61 180 top
E$621  [0207/10]  187.96,-92.71 270.2 top
E$622  [ZDIO-10]  182.88,-86.36 90 top
E$623  [255SB]  121.92,-58.42 0 top
E$624  [C5B7.2]  121.92,-48.26 90 top

## Library data of the parts
E$1-E$8 E$12-E$15 E$40-E$43 E$102 E$106-E$112 E$121-E$128 E$209-E$216 E$225-E$232 E$313-E$320 E$329-E$336 E$417-E$424 E$433-E$440 E$521-E$528 E$537-E$544 = transistor
E$9-E$11 E$24-E$39 E$52-E$92 E$95-E$100 E$137-E$202 E$241-E$306 E$345-E$410 E$449-E$514 E$553-E$618 = pinhead
E$16-E$19 E$44-E$47 E$105 E$113-E$116 E$129-E$132 E$206 E$217-E$220 E$233-E$236 E$310 E$321-E$324 E$337-E$340 E$414 E$425-E$428 E$441-E$444 E$518 E$529-E$532 E$545-E$548 E$622 = diode
E$20-E$23 E$48-E$51 E$93 E$94 E$117-E$120 E$133-E$136 E$203 E$205 E$221-E$224 E$237-E$240 E$307 E$309 E$325-E$328 E$341-E$344 E$411 E$413 E$429-E$432 E$445-E$448 E$515 E$517 E$533-E$536 E$549-E$552 E$619 E$621 = resistor
E$101 E$104 E$204 E$208 E$308 E$312 E$412 E$416 E$516 E$520 E$620 E$624 = capacitor-wima
E$103 E$207 E$311 E$415 E$519 E$623 = switch

## Nets
S$2: E$2.C E$4.B E$50.1
S$4: E$4.E
S$5: E$3.B E$48.2
S$6: E$2.B E$51.2
S$7: E$5.B E$7.C E$21.1
S$8: E$45.A E$46.C
S$9: E$1.B E$3.C E$49.1
S$10: E$1.E
S$11: E$5.E
S$12: E$17.A E$18.C
S$14: E$8.E
S$15: E$23.1 E$67.1
S$16: E$6.C E$8.B E$22.1
S$17: E$6.B E$23.2
S$18: E$51.1 E$64.1
S$19: E$16.A E$19.C
S$20: E$103.1
S$21: E$7.B E$20.2
S$22: E$44.A E$47.C
S$23: E$48.1 E$65.1
S$25: E$1.C E$4.C E$29.1 E$44.C E$45.C E$49.2 E$50.2 E$58.1 E$59.1 E$101.2 E$103.3 E$104.2
S$26: E$77.1
S$28: E$5.C E$8.C E$16.C E$17.C E$21.2 E$22.2 E$70.1 E$105.C
S$29: E$2.E E$3.E E$6.E E$7.E E$18.A E$19.A E$46.A E$47.A E$71.1 E$97.1 E$101.1 E$104.1
S$31: E$103.2
S$33: E$102.B E$107.C E$118.1
S$34: E$102.E
S$35: E$108.E
S$36: E$20.1 E$66.1
S$37: E$106.C E$108.B E$119.1
S$40: E$121.B E$123.C E$134.1
S$41: E$121.E
S$42: E$124.E
S$43: E$122.C E$124.B E$135.1
S$44: E$130.A E$131.C
S$45: E$129.A E$132.C
S$46: E$133.1 E$168.1
S$47: E$120.1 E$166.1
S$48: E$117.1 E$167.1
S$50: E$180.1
S$51: E$114.A E$115.C
S$52: E$113.A E$116.C
S$53: E$121.C E$124.C E$129.C E$130.C E$134.2 E$135.2 E$172.1 E$206.C
S$54: E$136.1 E$169.1
S$55: E$107.B E$117.2
S$56: E$106.B E$120.2
S$57: E$122.B E$136.2
S$58: E$123.B E$133.2
S$59: E$106.E E$107.E E$115.A E$116.A E$122.E E$123.E E$131.A E$132.A E$173.1 E$199.1 E$204.1 E$208.1
S$60: E$207.2
S$61: E$102.C E$108.C E$113.C E$114.C E$118.2 E$119.2 E$142.1 E$157.1 E$158.1 E$204.2 E$207.3 E$208.2
S$62: E$207.1
S$65: E$209.B E$211.C E$222.1
S$66: E$209.E
S$67: E$212.E
S$68: E$210.C E$212.B E$223.1
S$71: E$225.B E$227.C E$238.1
S$72: E$225.E
S$73: E$228.E
S$74: E$226.C E$228.B E$239.1
S$75: E$234.A E$235.C
S$76: E$233.A E$236.C
S$77: E$237.1 E$272.1
S$78: E$224.1 E$270.1
S$79: E$221.1 E$271.1
S$81: E$284.1
S$82: E$218.A E$219.C
S$83: E$217.A E$220.C
S$84: E$225.C E$228.C E$233.C E$234.C E$238.2 E$239.2 E$276.1 E$310.C
S$85: E$240.1 E$273.1
S$86: E$211.B E$221.2
S$87: E$210.B E$224.2
S$88: E$226.B E$240.2
S$89: E$227.B E$237.2
S$90: E$210.E E$211.E E$219.A E$220.A E$226.E E$227.E E$235.A E$236.A E$277.1 E$303.1 E$308.1 E$312.1
S$91: E$311.2
S$92: E$209.C E$212.C E$217.C E$218.C E$222.2 E$223.2 E$246.1 E$261.1 E$262.1 E$308.2 E$311.3 E$312.2
S$93: E$311.1
S$96: E$313.B E$315.C E$326.1
S$97: E$313.E
S$98: E$316.E
S$99: E$314.C E$316.B E$327.1
S$102: E$329.B E$331.C E$342.1
S$103: E$329.E
S$104: E$332.E
S$105: E$330.C E$332.B E$343.1
S$106: E$338.A E$339.C
S$107: E$337.A E$340.C
S$108: E$341.1 E$376.1
S$109: E$328.1 E$374.1
S$110: E$325.1 E$375.1
S$112: E$388.1
S$113: E$322.A E$323.C
S$114: E$321.A E$324.C
S$115: E$329.C E$332.C E$337.C E$338.C E$342.2 E$343.2 E$380.1 E$414.C
S$116: E$344.1 E$377.1
S$117: E$315.B E$325.2
S$118: E$314.B E$328.2
S$119: E$330.B E$344.2
S$120: E$331.B E$341.2
S$121: E$314.E E$315.E E$323.A E$324.A E$330.E E$331.E E$339.A E$340.A E$381.1 E$407.1 E$412.1 E$416.1
S$122: E$415.2
S$123: E$313.C E$316.C E$321.C E$322.C E$326.2 E$327.2 E$350.1 E$365.1 E$366.1 E$412.2 E$415.3 E$416.2
S$124: E$415.1
S$127: E$417.B E$419.C E$430.1
S$128: E$417.E
S$129: E$420.E
S$130: E$418.C E$420.B E$431.1
S$133: E$433.B E$435.C E$446.1
S$134: E$433.E
S$135: E$436.E
S$136: E$434.C E$436.B E$447.1
S$137: E$442.A E$443.C
S$138: E$441.A E$444.C
S$139: E$445.1 E$480.1
S$140: E$432.1 E$478.1
S$141: E$429.1 E$479.1
S$143: E$492.1
S$144: E$426.A E$427.C
S$145: E$425.A E$428.C
S$146: E$433.C E$436.C E$441.C E$442.C E$446.2 E$447.2 E$484.1 E$518.C
S$147: E$448.1 E$481.1
S$148: E$419.B E$429.2
S$149: E$418.B E$432.2
S$150: E$434.B E$448.2
S$151: E$435.B E$445.2
S$152: E$418.E E$419.E E$427.A E$428.A E$434.E E$435.E E$443.A E$444.A E$485.1 E$511.1 E$516.1 E$520.1
S$153: E$519.2
S$154: E$417.C E$420.C E$425.C E$426.C E$430.2 E$431.2 E$454.1 E$469.1 E$470.1 E$516.2 E$519.3 E$520.2
S$155: E$519.1
S$158: E$521.B E$523.C E$534.1
S$159: E$521.E
S$160: E$524.E
S$161: E$522.C E$524.B E$535.1
S$164: E$537.B E$539.C E$550.1
S$165: E$537.E
S$166: E$540.E
S$167: E$538.C E$540.B E$551.1
S$168: E$546.A E$547.C
S$169: E$545.A E$548.C
S$170: E$549.1 E$584.1
S$171: E$536.1 E$582.1
S$172: E$533.1 E$583.1
S$174: E$596.1
S$175: E$530.A E$531.C
S$176: E$529.A E$532.C
S$177: E$537.C E$540.C E$545.C E$546.C E$550.2 E$551.2 E$588.1 E$622.C
S$178: E$552.1 E$585.1
S$179: E$523.B E$533.2
S$180: E$522.B E$536.2
S$181: E$538.B E$552.2
S$182: E$539.B E$549.2
S$183: E$522.E E$523.E E$531.A E$532.A E$538.E E$539.E E$547.A E$548.A E$589.1 E$615.1 E$620.1 E$624.1
S$184: E$623.2
S$185: E$521.C E$524.C E$529.C E$530.C E$534.2 E$535.2 E$558.1 E$573.1 E$574.1 E$620.2 E$623.3 E$624.2
S$186: E$623.1